# Altium PCB trigger_box_new.PcbDoc
Units mil, origin at the board's own origin, x right, y up, seen from the top; angles counter-clockwise.
Board outline 2204.72 x 2204.72 mil, 2 copper layers (Top Layer, Bottom Layer); 63 components, 59 nets, 323 pads, 69 vias.
Unrouted connection lines stored in the file: 57.
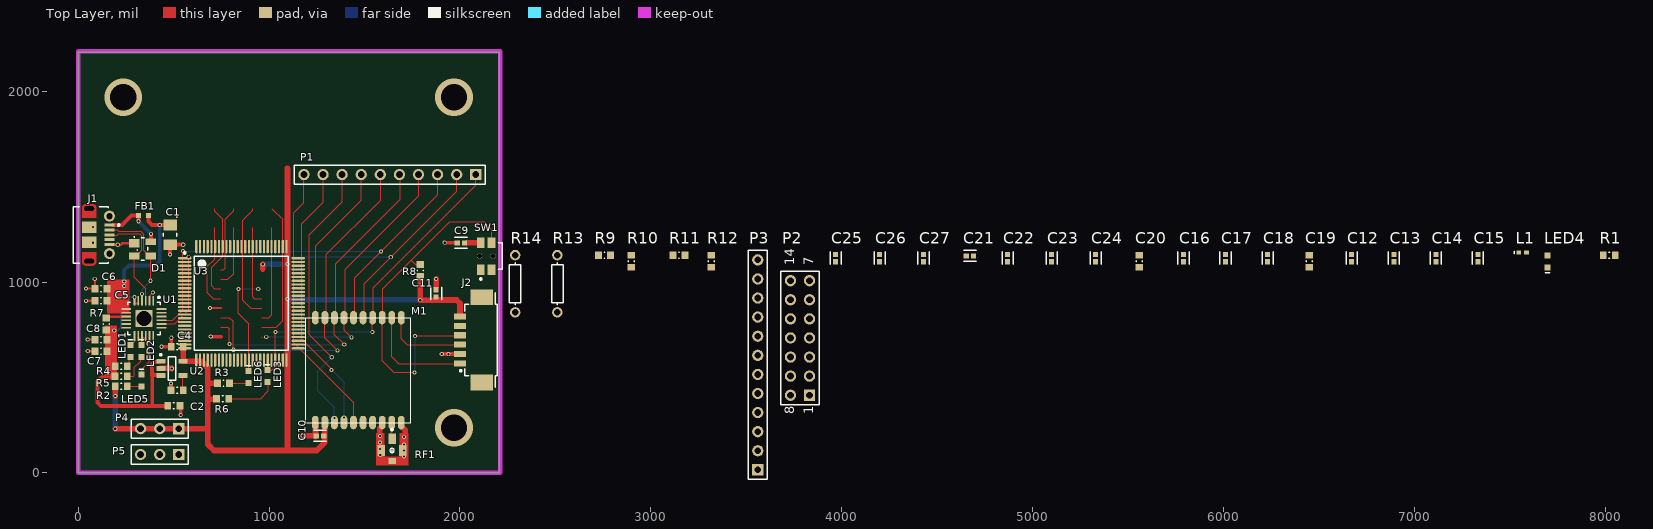
[diagram p0: Top Layer view]
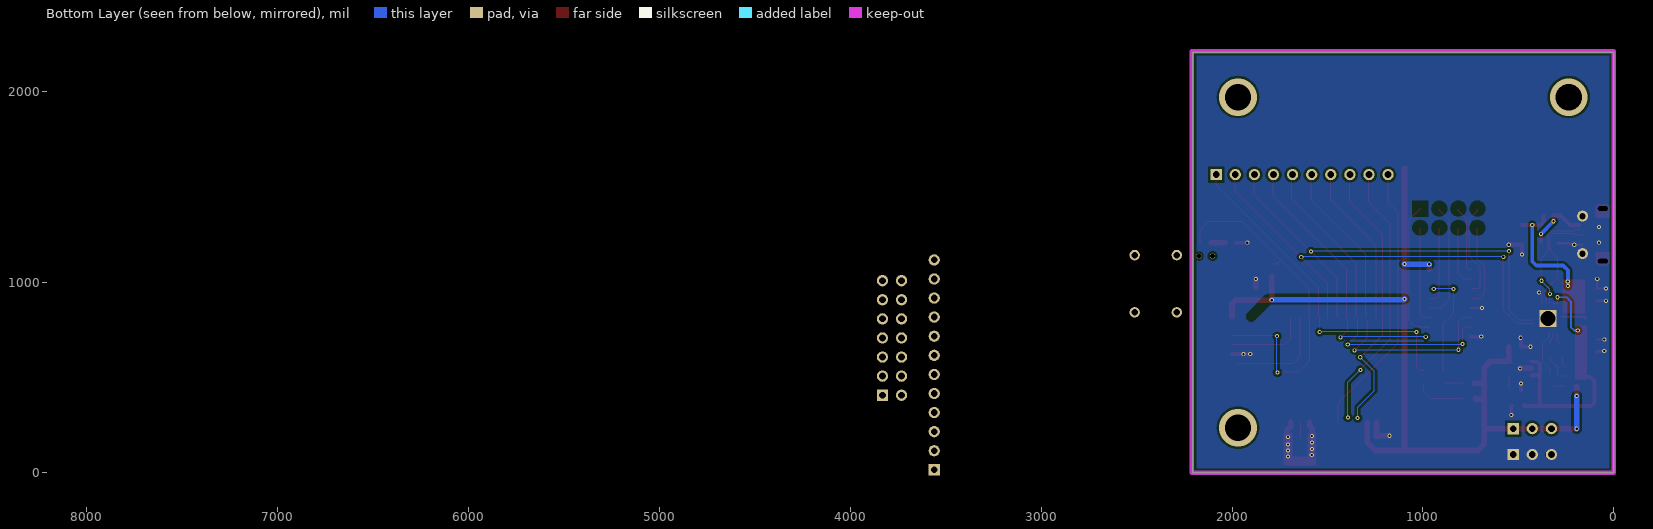
[diagram p1: Bottom Layer view, seen from below]

## Layer stack, top to bottom
Top Solder: solder mask 0.4, Solder Resist, Dk 3.5
Top Layer: signal copper 1.4
Dielectric 1: dielectric 12.6, FR-4, Dk 4.8
Bottom Layer: signal copper 1.4
Bottom Solder: solder mask 0.4, Solder Resist, Dk 3.5

## Board outline
0,0 0,2204.72 2204.72,2204.72 2204.72,0

## Design rules (kind name [scope] priority, off if disabled: settings)
Clearance Clearance_Ploy [InPoly] p1: gap=12 ignorepadtopadclearanceinfootprint=FALSE
Clearance [All] p2: gap=5 ignorepadtopadclearanceinfootprint=FALSE
ComponentClearance [All] p1: gap=4 collisioncheckmode=3 verticalgap=4 showdistances=FALSE
HoleSize [All] p1: absolutevalues=TRUE maxlimit=255.91 minlimit=11.81 maxpercent=80.000 minpercent=20.000
HoleToHoleClearance [All] p1: gap=4 allowstackedmicrovias=TRUE
MinimumSolderMaskSliver [All] p1: minsoldermaskwidth=0
PolygonConnect [All] p1: connectstyle=Direct reliefconductorwidth=10 reliefentries=4 polygonreliefangle="90 Angle" airgapwidth=10
RoomDefinition triggerbox [InComponentClass('triggerbox')] p1: confinementstyle=ConfineIn formatcopy=TRUE lockcomponents=FALSE outline 2249.95,-43 8085.95,-43 8085.95,1275 2249.95,1275
RoutingVias [All] p1: holewidth=12 width=20 viastyle="Through Hole" minholewidth=11.81 minwidth=19.68 maxholewidth=248.03 maxwidth=393.7
SilkToSilkClearance [All] p1: silktosilkclearance=0
SilkToSolderMaskClearance [IsPad] p1: minsilkscreentomaskgap=0 clearancetoexposedcopper=TRUE
SolderMaskExpansion [All] p1: expansion=1 istentingtop=FALSE
Width [All] p1: maxlimit=30 minlimit=5 preferedwidth=6 minimp=50.000000 maximp=50.000000 favimp=50.000000
24 further rules are at their usual default settings.

## Classes and differential pairs
component class triggerbox: C1 C2 C3 C4 C5 C6 C7 C8 C9 C10 C11 C12 C13 C14 C15 C16 C17 C18 C19 C20 C21 C22 C23 C24 C25 C26 C27 D1 FB1 J1 J2 L1 LED1 LED2 LED3 LED5 LED6 M1 P1 P5 R2 R3 R4 R5 R6 R7 R8 R9 R10 R11 R12 R13 R14 RF1 SW1 U1 U2 U3

## Components (designator, comment, footprint, x,y, rotation, side; value= is the part's Value field where it differs from the comment)
C1 "TAJA106K016RNJ" CAPMP3217X18-T_V 481.39,1247.36 r270 top
C2 "1uF" CAPC0603(1608)55_N 501.14,351.14 r180 top value=4.7uF
C3 "10nF" CAPC0603(1608)55_N 518.24,433.7 r0 top value=4.7uF
C4 "2.2uF" CAPC0603(1608)55_N 519.43,661.15 r0 top value=4.7uF
C5 "CAP 100nF 6.3V" CAPC0603(1608)100_N 119.8,901.71 r0 top value=100nF
C6 "CAP 4.7uF 6.3V" CAPC0603(1608)100_N 119.8,965.78 r0 top value=4.7uF
C7 "CAP 100nF 6.3V" CAPC0603(1608)100_N 119.45,637.33 r0 top value=100nF
C8 "CAP 4.7uF 6.3V" CAPC0603(1608)100_N 119.45,698.27 r0 top value=4.7uF
C9 "0.1uF" FP-GRM155-0_05-IPC_A 2004.68,1205.04 r180 top
C10 "0.1uF" FP-GRM155-0_05-IPC_A 1266.67,194.37 r180 top
C11 "0.01uF" FP-GRM155-0_05-IPC_A 1875.26,939.98 r90 top
C12 "10uF" FP-GRM155-0_05-IPC_A 6670.95,1125 r90 top
C13 "1uF" FP-GRM155-0_05-IPC_A 6891.95,1125 r90 top
C14 "0.1uF" FP-GRM155-0_05-IPC_A 7111.95,1125 r90 top
C15 "0.01uF" FP-GRM155-0_05-IPC_A 7331.95,1125 r90 top
C16 "0.1uF" FP-GRM155-0_05-IPC_A 5789.95,1125 r90 top
C17 "0.1uF" FP-GRM155-0_05-IPC_A 6009.95,1125 r90 top
C18 "0.01uF" FP-GRM155-0_05-IPC_A 6230.95,1125 r90 top
C19 "CAP 1uF 25V" CAPC0603(1608)100_N 6448.95,1109 r90 top value=1uF
C20 "CAP 100nF 6.3V" CAPC0603(1608)100_N 5557.95,1109 r90 top value=100nF
C21 "0.1uF" FP-GRM155-0_05-IPC_A 4670.95,1137 r0 top
C22 "0.1uF" FP-GRM155-0_05-IPC_A 4868.95,1125 r90 top
C23 "0.1uF" FP-GRM155-0_05-IPC_A 5098.95,1125 r90 top
C24 "0.01uF" FP-GRM155-0_05-IPC_A 5329.95,1125 r90 top
C25 "0.1uF" FP-GRM155-0_05-IPC_A 3967.95,1125 r90 top
C26 "0.1uF" FP-GRM155-0_05-IPC_A 4197.95,1125 r90 top
C27 "0.01uF" FP-GRM155-0_05-IPC_A 4427.95,1125 r90 top
D1 "SP0503BAHTG" LFUS-SOT143-4_V 337.6,1173.37 r0 top
FB1 "BLM18PG600SN1J" MURA-BLM18PG_KG-CHIP-2_V2 342.15,1348.46 r180 top
J1 "105017-0001" USB-MICRO-B_V 110.65,1246.97 r270 top
J2 "Header 6" GH-1.25-WS-6P 2110.81,696.29 r90 top
L1 "500mA" 0402-A 7566.95,1154 r0 top value=600ohm
LED1 "150060BS75000" 0603_A 274.53,638.06 r270 top
LED2 "150060BS75000" 0603_A 332.59,638.76 r270 top
LED3 "150060BS75000" 0603_A 992.62,506.97 r270 top
LED4 "150060BS75000" 0603_A 7696.95,1107 r90 top
LED5 "150060BS75000" 0603_A 332.59,485.19 r270 top
LED6 "150060BS75000" 0603_A 892.31,501.71 r270 top
M1 "CC1310-Module (Silicontrac)" CC1310ZTR4-GC 1742.52,264.53 r180 top
P1 "Header 10" HDR1X10 2082.58,1562.58 r180 top
P2 "Header 7X2A" HDR2X7_CEN 3830.95,407 r90 top
P3 "Header 12" HDR1X12 3559.95,16 r90 top
P4 "Header 3" HDR1X3 527,231.84 r180 top
P5 "Header 3" HDR1X3 526.82,96.29 r180 top
R1 "1K 1%" RESC0603(1608)_N 8019.95,1139 r0 top value="1000.00 Ohm"
R2 "1K 1%" RESC0603(1608)_N 225.55,454.62 r180 top value="1000.00 Ohm"
R3 "1K 1%" RESC0603(1608)_N 760.92,469.44 r180 top value="1000.00 Ohm"
R4 "1K 1%" RESC0603(1608)_N 225.35,559.47 r180 top value="1000.00 Ohm"
R5 "1K 1%" RESC0603(1608)_N 225,505.54 r180 top value="1000.00 Ohm"
R6 "1K 1%" RESC0603(1608)_N 756.68,389.47 r180 top value="1000.00 Ohm"
R7 "1K 1%" RESC0603(1608)_N 147.93,779.47 r90 top value="1000.00 Ohm"
R8 "10K 1% 0603(1608)" RESC0603(1608)_N 1792.05,1060.59 r90 top value="10000.00 Ohm"
R9 "1" RESC0603(1608)_N 2756.95,1139 r0 top value="1000.00 Ohm"
R10 "1" RESC0603(1608)_N 2896.95,1109 r90 top value="1000.00 Ohm"
R11 "1" RESC0603(1608)_N 3146.95,1139 r0 top value="1000.00 Ohm"
R12 "1" RESC0603(1608)_N 3316.95,1109 r90 top value="1000.00 Ohm"
R13 "Res1" AXIAL-0.3 2509.95,991 r90 top value=0
R14 "Res1" AXIAL-0.3 2288.95,991 r90 top value="1K 5%"
RF1 "RECE-20369-001E-01" IPEX_MHF_I 1644.06,117.11 r180 top
SW1 "EVQ-P7D01K" FP-EVQ-P7D01K-MFG 2137.38,1135.66 r90 top
U1 "CP2102N-A01-GQFN24" SLAB-QFN-24-2550x2550TP_A_V 344.19,809.26 r270 top
U2 "LP2985-33DBVR" DBV0005A_M 490.94,547.49 r0 top
U3 "LCMXO2-256HC-4TG100I" TQFP100_N 855.23,888.52 r0 top

## Footprints (in the part's own frame and the unit in brackets; to place one, negate y for a bottom-side part, rotate by r counter-clockwise, add the part's x,y. Pads: shape width x height; smd on the part's side, far side on the other; paste and mask are expansions set on the pad)
0402-A [mm] "Chip Inductor, Body 1.0x0.5mm, IPC High Density"
  rect 0.6x0.5 smd: 1(-0.5,0) 2(0.5,0)
  silkscreen extent -1.1,-0.15 -1.1,0.15, body extent -0.55,-0.3 0.55,0.3, height 0.55
0603_A [mm] "Chip LED, 2-Leads, Body 1.6x0.8mm, IPC Medium Density"
  rect 0.8x0.8 smd: 1(-0.8,0) 2(0.8,0)
  silkscreen extent -1.5,-0.3 -1.5,0.3, body extent -0.8,-0.4 0.8,0.4, height 0.7
AXIAL-0.3 [mm] "Axial Device, Thru-Hole; 2 Leads; 0.3 in Pin Spacing"
  round 1.4 hole 0.85: 1(-3.81,0) 2(3.81,0)
  silkscreen extent -2.77,-0.76 2.77,0.76
CAPC0603(1608)55_N [mm] "Chip Capacitor, Body 1.6x0.8mm, Height 0.55mm, IPC Medium Density"
  rect 0.9x1 smd: 1(-0.8,0) 2(0.8,0)
  silkscreen extent -0.05,-0.4 0.05,0.4, body extent -0.87,-0.48 0.88,0.47, height 0.55
CAPC0603(1608)100_N [mm] "Chip Capacitor, Body 1.6x0.8mm, Height 1.0mm, IPC Medium Density"
  rect 0.9x1 smd: 1(-0.8,0) 2(0.8,0)
  silkscreen extent -0.05,-0.4 0.05,0.4, body extent -0.87,-0.48 0.88,0.47, height 1
CAPMP3217X18-T_V [mm] "Molded Capacitor, 2-Leads, Body 3.40x1.8mm"
  rect 1.4x1.8 smd: 1(-1.3,0) 2(1.3,0)
  silkscreen extent -2.45,-0.9 0.2,0.95, body extent -1.92,-0.9 1.92,0.9, height 1.8
CC1310ZTR4-GC [mm]
  oval 0.9x1.8 smd: 1(1.27,-13.945) 2(2.544,-13.945) 3(3.814,-13.945) 4(5.084,-13.945) 5(6.354,-13.945) 6(7.624,-13.945) 7(8.894,-13.945) 8(10.164,-13.945) 9(11.434,-13.945) 10(12.704,-13.945) 11(12.708,0.015) 12(11.438,0.015) 13(10.168,0.015) 14(8.898,0.015) 15(7.628,0.015) 16(6.358,0.015) 17(5.088,0.015) 18(3.818,0.015) 19(2.548,0.015) 20(1.28,0.015)
  silkscreen extent 0,-13.94 14,0.06
DBV0005A_M [mm] "SOT23, 5-Leads, Body 3.05x1.75mm, Pitch 0.95mm, IPC Low Density"
  rrect15% 1.2x0.65 smd: 1(-1.475,0.95) 2(-1.475,0) 3(-1.475,-0.95) 4(1.475,-0.95) 5(1.475,0.95)
  silkscreen extent -1.6,-1.55 0.5,1.95, body extent -1.42,-1.46 1.42,1.46, height 1.08
FP-EVQ-P7D01K-MFG [mm]
  rect 1.4x1.05 smd paste+0 mask+0: 1(-1.8,0.725) 1'(1.8,0.725) 2(-1.8,-0.725) 2'(1.8,-0.725)
  round 0.7 hole 0.7 unplated paste-1000 mask+0: ""(0,0.9) ""(0,-0.9)
  silkscreen extent -3.17,-2.1 1.75,0.85, body extent -2.6,-2.2 2.6,1.55, height 0.25
FP-GRM155-0_05-IPC_A [mil]
  rect 28.16x26.48 smd paste+0 mask+0: 1(-18.84,0) 2(18.84,0)
  silkscreen extent -33,-29 33,29, body extent -41,-21 41,21, height 10
GH-1.25-WS-6P [mm]
  rect 0.81x1.6 smd: 1(-3.125,2.8) 2(-1.875,2.8) 3(-0.625,2.8) 4(0.625,2.8) 5(1.875,2.8) 6(3.125,2.8)
  rect 2.1x3 smd: MP1(-5.675,-0.1) MP2(5.675,-0.1)
  silkscreen extent -6.27,-2.17 6.27,2.82, body extent -6.13,-2.1 6.13,3.3, height 3.4
HDR1X3 [mm] "Connector; Header; 3 Position"
  rect 1.5x1.5 hole 0.9: 1(0,0)
  round 1.5 hole 0.9: 2(2.54,0) 3(5.08,0)
  silkscreen extent -1.27,-1.27 6.35,1.27
HDR1X10 [mm] "Connector; Header; 10 Position"
  rect 1.5x1.5 hole 0.9: 1(0,0)
  round 1.5 hole 0.9: 2(2.54,0) 3(5.08,0) 4(7.62,0) 5(10.16,0) 6(12.7,0) 7(15.24,0) 8(17.78,0) 9(20.32,0) 10(22.86,0)
  silkscreen extent -1.27,-1.27 24.13,1.27
HDR1X12 [mm] "Connector; Header; 12 Position"
  rect 1.5x1.5 hole 0.9: 1(0,0)
  round 1.5 hole 0.9: 2(2.54,0) 3(5.08,0) 4(7.62,0) 5(10.16,0) 6(12.7,0) 7(15.24,0) 8(17.78,0) 9(20.32,0) 10(22.86,0) 11(25.4,0) 12(27.94,0)
  silkscreen extent -1.27,-1.27 29.21,1.27
HDR2X7_CEN [mm] "Connector; Header; 7x2 Position"
  rect 1.5x1.5 hole 0.9: 1(0,0)
  round 1.5 hole 0.9: 2(2.54,0) 3(5.08,0) 4(7.62,0) 5(10.16,0) 6(12.7,0) 7(15.24,0) 8(0,2.54) 9(2.54,2.54) 10(5.08,2.54) 11(7.62,2.54) 12(10.16,2.54) 13(12.7,2.54) 14(15.24,2.54)
  silkscreen extent -1.27,-1.27 16.51,3.81
IPEX_MHF_I [mm]
  rect 1x1.4 smd: 1(0,-1.575)
  rect 1x1.5 smd: 2(1.448,0) 3(-1.448,0)
  rect 1x0.8 smd: 4(0,1.422)
  silkscreen extent -0.3,-2.92 0.3,0.3, body extent -0.85,-0.85 0.85,0.85, height 0.85
LFUS-SOT143-4_V [mm] "SOT143, 4-Leads, Body 3.04x1.4mm, Pitch 1.90mm"
  rect 1.4x1.1 smd: 1(-1.1,0.75)
  rect 1.4x0.9 smd: 2(-1.1,-0.95) 3(1.1,-0.95) 4(1.1,0.95)
  silkscreen extent -1.15,-1.5 0.7,1.65, body extent -0.7,-1.52 0.7,1.52, height 1.22
MURA-BLM18PG_KG-CHIP-2_V2 [mm] "Chip Ferrite Bead, 2-Leads, Body 1.6x0.8mm, Height 0.95mm, Reflow, 0.5 to 1.5A Rated Current"
  rect 0.65x0.7 smd: 1(-0.675,0) 2(0.675,0)
  body extent -0.8,-0.4 0.8,0.4, height 0.95
RESC0603(1608)_N [mm] "Chip Resistor, Body 1.6x0.8mm, IPC Medium Density"
  rect 0.9x1 smd: 1(-0.8,0) 2(0.8,0)
  silkscreen extent -0.05,-0.4 0.05,0.4, body extent -0.85,-0.47 0.85,0.47, height 0.6
SLAB-QFN-24-2550x2550TP_A_V [mm]
  rect 1.3x0.25 smd: 1(-2.35,1.25) 2(-2.35,0.75) 3(-2.35,0.25) 4(-2.35,-0.25) 5(-2.35,-0.75) 6(-2.35,-1.25) 13(2.35,-1.25) 14(2.35,-0.75) 15(2.35,-0.25) 16(2.35,0.25) 17(2.35,0.75) 18(2.35,1.25)
  rect 0.25x1.3 smd: 7(-1.25,-2.35) 8(-0.75,-2.35) 9(-0.25,-2.35) 10(0.25,-2.35) 11(0.75,-2.35) 12(1.25,-2.35) 19(1.25,2.35) 20(0.75,2.35) 21(0.25,2.35) 22(-0.25,2.35) 23(-0.75,2.35) 24(-1.25,2.35)
  rect 2.3x2.3 hole 2: 25(0,0)
  silkscreen extent -2.92,-2.15 2.15,2.15, body extent -2,-2 2,2, height 0.8
TQFP100_N [mm] "Thin QFP, 100-Leads, Body 14x14mm, Pitch 0.5mm, IPC Medium Density"
  oval 1.8x0.3 smd: 1(-7.55,6) 2(-7.55,5.5) 3(-7.55,5) 4(-7.55,4.5) 5(-7.55,4) 6(-7.55,3.5) 7(-7.55,3) 8(-7.55,2.5) 9(-7.55,2) 10(-7.55,1.5) 11(-7.55,1) 12(-7.55,0.5) 13(-7.55,0) 14(-7.55,-0.5) 15(-7.55,-1) 16(-7.55,-1.5) 17(-7.55,-2) 18(-7.55,-2.5) 19(-7.55,-3) 20(-7.55,-3.5) 21(-7.55,-4) 22(-7.55,-4.5) 23(-7.55,-5) 24(-7.55,-5.5) 25(-7.55,-6) 51(7.55,-6) 52(7.55,-5.5) 53(7.55,-5) 54(7.55,-4.5) 55(7.55,-4) 56(7.55,-3.5) 57(7.55,-3) 58(7.55,-2.5) 59(7.55,-2) 60(7.55,-1.5) 61(7.55,-1) 62(7.55,-0.5) 63(7.55,0) 64(7.55,0.5) 65(7.55,1) 66(7.55,1.5) 67(7.55,2) 68(7.55,2.5) 69(7.55,3) 70(7.55,3.5) 71(7.55,4) 72(7.55,4.5) 73(7.55,5) 74(7.55,5.5) 75(7.55,6)
  oval 0.3x1.8 smd: 26(-6,-7.55) 27(-5.5,-7.55) 28(-5,-7.55) 29(-4.5,-7.55) 30(-4,-7.55) 31(-3.5,-7.55) 32(-3,-7.55) 33(-2.5,-7.55) 34(-2,-7.55) 35(-1.5,-7.55) 36(-1,-7.55) 37(-0.5,-7.55) 38(0,-7.55) 39(0.5,-7.55) 40(1,-7.55) 41(1.5,-7.55) 42(2,-7.55) 43(2.5,-7.55) 44(3,-7.55) 45(3.5,-7.55) 46(4,-7.55) 47(4.5,-7.55) 48(5,-7.55) 49(5.5,-7.55) 50(6,-7.55) 76(6,7.55) 77(5.5,7.55) 78(5,7.55) 79(4.5,7.55) 80(4,7.55) 81(3.5,7.55) 82(3,7.55) 83(2.5,7.55) 84(2,7.55) 85(1.5,7.55) 86(1,7.55) 87(0.5,7.55) 88(0,7.55) 89(-0.5,7.55) 90(-1,7.55) 91(-1.5,7.55) 92(-2,7.55) 93(-2.5,7.55) 94(-3,7.55) 95(-3.5,7.55) 96(-4,7.55) 97(-4.5,7.55) 98(-5,7.55) 99(-5.5,7.55) 100(-6,7.55)
  silkscreen extent -7.67,-6.25 6.25,6.82, body extent -7,-7 7,7, height 1.6
USB-MICRO-B_V [mm] "USB, MICRO B, Body 7.491x4.695 mm, Pitch 0.65 mm"
  rect 0.4x1.35 smd: 1(-1.3,1.35) 2(-0.65,1.35) 3(0,1.35) 4(0.65,1.35) 5(1.3,1.35)
  round 1.45 hole 0.85: 6(-2.5,1.35) 7(2.5,1.35)
  rrect50% 0x0 hole 0.6 slot 1.3 at 90 deg: 8(-3.5,-1.35) 11(3.5,-1.35)
  rect 1.5x1.9 smd: 9(-1,-1.35) 10(1,-1.35)
  Top Layer circle w0.5: c-3.6,-0.9 r0.25
  Top Layer circle w0.5: c-3.6,-1.8 r0.25
  Top Layer region: -2.3,-2.3 -2.3,-0.4 -3.6,-0.4 -3.6,-2.3
  Top Layer region: 2.3,-0.4 2.3,-2.3 3.6,-2.3 3.6,-0.4
  Top Layer region: 3.6,-0.9 3.6,-1.8 4.1,-1.8 4.1,-0.9
  Top Layer region: -3.6,-1.8 -3.6,-0.9 -4.1,-0.9 -4.1,-1.8
  Top Layer lines w0.5: 3.805,-1.657 cw(c3.6,-1.8) 3.395,-1.657 cw(c3.6,-1.8) 3.6,-1.55 cw(c3.6,-1.8) 3.805,-1.657 ; 3.508,-1.132 cw(c3.6,-0.9) 3.368,-0.992 cw(c3.6,-0.9) 3.367,-0.991 cw(c3.6,-0.9) 3.6,-0.65 cw(c3.6,-0.9) 3.508,-1.132
  silkscreen extent -3.75,-3.5 3.75,2.7, body extent -4.1,-3.9 4.1,1.5, height 2.67

## Part data
C1: library part CMP-1661-00004-1, "Standard Tantalum, 10 uF, +/- 10%, 16 V, -55 to 125 degC, 2-Pin SMD (1206), RoHS, Tape and Reel", Case\Package=SOT-26, Frequency="300 MHz", Max Operating Temperature="150 degC", Max Power Dissipation="300 mW", Min Operating Temperature="-55 degC", Package Quantity=3000, ComponentLink1Description="Manufacturer URL", ComponentLink1URL=http://www.avx.com/, ComponentLink2Description=Datasheet, ComponentLink2URL=http://datasheets.avx.com/TAJ.pdf, ComponentLink3Description="Package Specification", ComponentLink3URL=http://www.avx.com/download/software/literature/AVX-Footprint-Library.pdf, DatasheetVersion=Feb-16, Elements=2, Height="1.3 mm", hFE Min=60, Length="3.1 mm", Mount="Surface Mount", PackageDescription="2-Pin Surface Mount Device, Body 3.2 x 1.65 mm", PackageReference=CAPMP3217X18-T, Packaging="Tape and Reel", Pins=6, Radiation Hardening=No, REACH SVHC="No SVHC", RoHSCompliant=true, Vce Max="500 mV", Width="1.7 mm"
C2 C3 C4: library part CMP-1035-02786-1, "CAP 4.7uF 10V ±20% 0603 (1608 Metric) Thickness 0.55mm SMD", Case-EIA=0603, Case-Metric=1608, Rated Voltage="10 V", Tolerance=Â±20%, Max Thickness="0.55 mm", Technology=SMT
C5 C7: library part CMP-1035-02575-1, "CAP 100nF 6.3V ±5% 0603 (1608 Metric) Thickness 1mm SMD", Case-EIA=0603, Case-Metric=1608, Rated Voltage="6.3 V", Tolerance=Â±5%, Max Thickness="1 mm", Technology=SMT
C6 C8: library part CMP-1035-02782-1, "CAP 4.7uF 6.3V ±20% 0603 (1608 Metric) Thickness 1mm SMD", Case-EIA=0603, Case-Metric=1608, Rated Voltage="6.3 V", Tolerance=Â±20%, Max Thickness="1 mm", Technology=SMT
C9 C10 C12 C13 C14 C15 C16 C17 C21 C22 C23 C25 C26: library part CMP-2008-04561-5, "CAP CER 0.1UF 10V X5R 0402", Capacitance=220nF, Case Code (Imperial)=0402, Case Code (Metric)=1005, Dielectric=X5R, Dielectric Material=Ceramic, Insulation Resistance=10GR, Max Operating Temperature=85°C, Min Operating Temperature=-55°C, Package Quantity=1, Tolerance=10%, Voltage=10V, Case/Package=0402, Depth=0.5mm, Height=0.5mm, Lead Free="Lead Free", Length=1mm, Material=Ceramic, Mount="Surface Mount", Number of Pins=2, Packaging="Tape and Reel", Radiation Hardening=No, REACH SVHC="No SVHC", RoHS Compliant=Yes, Series=GRM, Termination=SMD/SMT, Thickness=0.022inch, Voltage Rating=10V, Voltage Rating (DC)=10V, Width=0.5mm
C11 C18 C24 C27: library part CMP-2008-04561-5, "CAP CER 0.01UF 10V X5R 0402", Capacitance=220nF, Case Code (Imperial)=0402, Case Code (Metric)=1005, Dielectric=X5R, Dielectric Material=Ceramic, Insulation Resistance=10GR, Max Operating Temperature=85°C, Min Operating Temperature=-55°C, Package Quantity=1, Tolerance=10%, Voltage=10V, Case/Package=0402, Depth=0.5mm, Height=0.5mm, Lead Free="Lead Free", Length=1mm, Material=Ceramic, Mount="Surface Mount", Number of Pins=2, Packaging="Tape and Reel", Radiation Hardening=No, REACH SVHC="No SVHC", RoHS Compliant=Yes, Series=GRM, Termination=SMD/SMT, Thickness=0.022inch, Voltage Rating=10V, Voltage Rating (DC)=10V, Width=0.5mm
C19: library part CMP-1035-02741-1, "CAP 1uF 25V ±20% 0603 (1608 Metric) Thickness 1mm SMD", Case-EIA=0603, Case-Metric=1608, Rated Voltage="25 V", Tolerance=Â±20%, Max Thickness="1 mm", Technology=SMT
C20: library part CMP-1035-02576-1, "CAP 100nF 6.3V ±10% 0603 (1608 Metric) Thickness 1mm SMD", Case-EIA=0603, Case-Metric=1608, Rated Voltage="6.3 V", Tolerance=Â±10%, Max Thickness="1 mm", Technology=SMT
D1: library part CMP-2000-05191-1, "TVS Diode Array, 30 pF, 30 KV, -40 to 85 degC, 4-Pin SOT143, RoHS, Tape and Reel", Capacitance Value=30pF, Clamping Voltage=8V, Leakage Current=0.1uA, Manufacturer=Littelfuse, Operating Temp Range=-40Cto85C, Operating Temperature Classification=Industrial, Operating Temperature Max Deg. C=85C, Operating Temperature Min Deg. C=-40C, Package / Case=SOT-143, Reverse Stand-off Voltage=5.5(Min)V, Working Voltage=5.5V, Working Voltage (Max)=5.5V(Min), Clamping Voltage (Max)=8V, Configuration=Triple, Datasheet URL=https://datasheet.ciiva.com/15143/getdatasheetpartid-116020-15143550.pdf, Datasheet Version=Dec-13, Direction Type=Uni-Directional, Leakage Current (Max)=0.1uA, Manufacturer URL=http://www.littelfuse.com/, Mounting=SurfaceMount, Mounting Style=SurfaceMount, Number of Elements=3, Package Type=SOT-143, Packaging=TapeandReel, Pin Count=3+Tab, Polarity=Uni-Directional, Product Depth (mm)=1.4mm, Product Height (mm)=1.05mm, Product Length (mm)=3.04mm, Rad Hardened=No, Suppressor Type=TVS
FB1: library part CMP-0686-00574-2, "Chip Ferrite Bead for Power Lines, 60 Ohm, 500 mA, -55 to 125 degC, 1.6 x 0.8 x 0.95 mm SMD, Tape and Reel", DC Resistance="0.10 Ohm Max.", Manufacturer=Murata, Operating Temperature Range="-55 to 125 degC", Rated Current="500 mA", ComponentLink1Description="Manufacturer URL", ComponentLink1URL=http://www.murata.com/, ComponentLink2Description=Datasheet, ComponentLink2URL=http://www.murata.com/products/catalog/pdf/c31e.pdf, ComponentLink3Description="Package Specification", ComponentLink3URL=http://www.murata.com/products/catalog/pdf/c31e.pdf, DatasheetVersion=08/2013, Impedance (at 100 MHz)="60 Ohm Typ.", Mounting Technology="Surface Mount", PackageDescription="2-Pin Chip, Body 1.6 x 0.8 mm", PackageReference=BLM18_H950-2, Packing="Tape and Reel", PartNumber=BLM18PG600SN1J
J1: library part CMP-2000-05827-1, "Micro-USB B Receptacle, Right Angle, Bottom Mount, Surface Mount, with Solder Tabs, -30 to 85 degC, 5-Pin USB, RoHS, Tape and Reel", Manufacturer=Molex, Package Description="5-Leads USB, Micro B, Body 7.5 x 5 mm, Pitch 0.65 mm", Package Reference=MICRO-B, Package Version="Rev. F, 12/2012", Standard Package=1, Voltage - Max=30V, 3D Model=105017-0001.stp, Catalog Drawings=1050170001, Category=Connectors,Interconnects, Circuits=5, Connector Type=USB-microB, Datasheet URL=http://www.molex.com/elqNow/elqRedir.htm?ref=http://www.molex.com/webdocs/datasheets/pdf/en-us/1050170001_IO_CONNECTORS.pdf, Datasheet Version=03/2016, Family=USB,DVI,HDMIConnectors, Featured Product=Micro-USBConnectorsUSBConnectors, Features=Shielded,SolderRetention, Gender=Receptacle, Ingress Protection=-, Manufacturer URL=http://www.molex.com/, Mating Products=WM17145-ND-CABLEMICROUSBBTOSTDA1.0MWM17147-ND-CABLEMICROUSBBTOSTDA2.0MWM17146-ND-CABLEMICROUSBBTOSTDA1.5M, Mounting Technology=SurfaceMount, Mounting Type=BoardCutout,SurfaceMount,RightAngle, Number Of Contacts=5, Online Catalog=Molex-MicroUSB, Other Names=WM1399DKR, Package URL=http://www.molex.com/pdm_docs/sd/1050170001_sd.pdf, Packaging=Digi-Reel®, PCN Assembly/Origin=ResinSupplier21/Oct/2015, RoHS Information=1050170001CertofCompliance, Series=-, Specifications=-
J2: "Header, 6-Pin", LatestRevisionDate=17-Jul-2002, LatestRevisionNote="Re-released for DXP Platform.", Publisher="Altium Limited"
L1: library part Inductor, "Inductor", Code_IEC=1005, Code_JEITA=0402, LatestRevisionDate=29-May-2009, LatestRevisionNote="IPC-7351 Footprint Added.", PackageDescription="Chip Inductor", PackageReference=0402-A, Published=8-Jun-2000, Publisher="Altium Limited"
LED1 LED2 LED3 LED4 LED5 LED6: library part CMP-1426-00003-1, "SMD mono-color Chip LED, WL-SMCW, Blue", Color=Blue, Manufacturer="Wuerth Elektronik", ComponentLink1Description="Manufacturer URL", ComponentLink1URL=http://www.we-online.com, ComponentLink2Description=Datasheet, ComponentLink2URL=http://katalog.we-online.com/led/datasheet/150060BS75000.pdf, PackageReference=0603_A, PartNumber=150060BS75000
M1: library part CC1310-MOD
P1: "Header, 10-Pin", LatestRevisionDate=17-Jul-2002, LatestRevisionNote="Re-released for DXP Platform.", Publisher="Altium Limited"
P2: "Header, 7-Pin, Dual row", LatestRevisionDate=17-Jul-2002, LatestRevisionNote="Re-released for DXP Platform.", Publisher="Altium Limited"
P3: "Header, 12-Pin", LatestRevisionDate=17-Jul-2002, LatestRevisionNote="Re-released for DXP Platform.", Publisher="Altium Limited"
P4 P5: "Header, 3-Pin", LatestRevisionDate=17-Jul-2002, LatestRevisionNote="Re-released for DXP Platform.", Publisher="Altium Limited"
R1 R2 R3 R4 R5 R6 R9 R10 R11 R12: library part CMP-1012-00510-1, "1K 0.1W 1% 0603 (1608 Metric)  SMD", Case-EIA=0603, Case-Metric=1608, Power="0.1 W", Tolerance="1 %", Technology=SMT
R7: library part CMP-1012-00510-1, "1K 0.1W 1% 0603 (1608 Metric)  SMD", Case-EIA=0603, Case-Metric=1608, Manufacturer="Vishay Dale", Manufacturer Part Number=CRCW06031K00FKEB, Power="0.1 W", Tolerance="1 %", Technology=SMT
R8: library part CMP-1012-00623-1, "10K 0.1W 1% 0603 (1608 Metric)  SMD", Case-EIA=0603, Case-Metric=1608, Power="0.1 W", Tolerance="1 %", Technology=SMT
R13 R14: "Resistor", LatestRevisionDate=17-Jul-2002, LatestRevisionNote="Re-released for DXP Platform.", PackageDescription="Axial Device, Thru-Hole; 2 Leads; 0.3 in Pin Spacing", PackageReference=AXIAL-0.3, Published=8-Jun-2000, Publisher="Altium Limited"
RF1: library part TG-RECE-20369-001E-01-4, "RF Connector, Onboard Receptacle, IPEX MHFIII", Housing Color=Gold, Manufacturer=Taoglas, ComponentLink1Description="Manufacturer URL", ComponentLink1URL=http://www.taoglas.com/, ComponentLink2Description=Datasheet, ComponentLink2URL=http://www.taoglas.com/images/product_images/original_images/RECE.20369.001E.01.pdf, ComponentLink3Description="Package Specification", ComponentLink3URL=http://www.taoglas.com/images/product_images/original_images/RECE.20369.001E.01.pdf, DatasheetVersion="Rev. C", Mounting Technology="Surface Mount", PackageDescription="4-Pin, Hand Drawn, Body 1.7x1.7mm", PackageReference=RECE-20369-001E-01-4, PackageVersion="Rev. C", Packing="Tape and Reel", PartNumber=RECE-20369-001E-01
SW1: library part CMP-05618-000102-1, "SWITCH TACTILE SPST-NO 0.05A 12V", Actuator Color=Black, Contact Current Rating=50mA, Contact Resistance=500mR, Max Operating Temperature=70°C, Max Voltage Rating (DC)=12V, Min Operating Temperature=-20°C, Operating Force=2.2N, Package Quantity=1, Actuator Length=0.65mm, Current Rating=50mA, Depth=3.55mm, Electrical Life=100000Cycles, Illumination Type=Non-Illuminated, Lead Free="Lead Free", Length=4.3mm, Max Current Rating=50mA, Mechanical Life=100000Cycles, Mount="Surface Mount", Orientation="Right Angle", Packaging="Tape and Reel", Radiation Hardening=No, REACH SVHC="No SVHC", Series=EVQP7, Size=2.9mm, Switch Function=Off-Mom, Switch Travel=0.2mm, Termination=J-Bend, Throw Configuration=SPST, Voltage Rating (DC)=12V
U1: library part SLAB-CP2102N-QFN-24, "USBXpress(TM) Family, 4 GPIOs, 2.2 to 3.6 V, -40 to 85 degC, 24-Pin QFN, RoHS", Case\/Package=QFN, Manufacturer="Silicon Labs", Max Operating Temperature=85degC, Max Supply Voltage=3.6V, Min Operating Temperature=-40degC, Min Supply Voltage=3V, Package Description="24-Pin Quad Flat No-lead Package, Body 4 x 4 mm, Pitch 0.5 mm", Package Reference=QFN-24-2550x2550TP_A, Datasheet URL=http://www.silabs.com/documents/public/data-sheets/cp2102n-datasheet.pdf, Datasheet Version="Rev. 1.1, 08/2016", Manufacturer URL=http://www.silabs.com/, Mounting Technology=SurfaceMount, Number of Pins=24, REACH SVHC=Unknown, RoHSCompliant=False
U2: library part CMP-0758-00080-2, "Single Output Low Noise LDO, 150 mA, Fixed 3.3 V Output, 1.5% Tolerance, 2.2 to 16 V Input, Low IQ, 5-Pin SOT-23 (DBV), -40 to 125 degC, Green (RoHS & no Sb/Br), Tape and Reel", Manufacturer="Texas Instruments", Operating Temperature Range (degC)="-40 to 125", Accuracy (%)=1.5, ComponentLink1Description="Manufacturer URL", ComponentLink1URL=http://www.ti.com/, ComponentLink2Description=Datasheet, ComponentLink2URL=http://www.ti.com/lit/ds/symlink/lp2985-50.pdf, ComponentLink3Description="Package Specification", ComponentLink3URL=http://www.ti.com/litv/pdf/mpds018j, DatasheetVersion=SLVS522N, Fixed Output Options (V)=3.3, Iout (Max) (A)=0.15, Iq (Typ) (mA)=0.85, Mounting Technology="Surface Mount", Output Options="Fixed Output", PackageDescription="5-Pin Plastic Small Outline, Body 2.9 x 1.6 mm, Pitch 0.95 mm", PackageReference=DBV0005A, PackageVersion=4073253-4/L, Packing="Tape and Reel", PartNumber=LP2985-33DBVR, RoHS=TRUE, Vdo (Typ) (mV)=280, Vin (V)="2.2 to 16"
U3: library part CMP-0111-00366-1, "MachXO2 High Performance CPLD with 256 LUTs, Voltage Regulator, 2.5V/3.3V, 100-pin TQFP, Speed Grade-4, Industrial Grade, Halogen Free (RoHS)", Code_JEDEC=MS-026-BED, DatasheetVersion="ver01.0, Nov-2010", PackageDescription="100-Pin Thin Quad Flat Pack (TQFP100)", PackageReference=TQFP100, PackageVersion="ver02.6, Nov-2010"

## Via types
v1: diameter 21.65, hole 11.81, Top Layer to Bottom Layer, tented both sides, 61 vias
v2: diameter 21.65, hole 11.81, Top Layer to Bottom Layer, 5 vias
v3: diameter 196.85, hole 137.8, Top Layer to Bottom Layer, tented both sides, 3 vias

## Nets (pads, with @x,y where several pads share a name; then routed paths per layer and width w, separated by ;. In a path a pad name is that pad's centre, name@x,y a point inside that pad or via, vN(x,y) a via of type N, cw(c..) or ccw(c..) an arc to the next point about the centre after c; other vN are vias at no path point)
3.3V: C12.1 C13.1 C14.1 C15.1 L1.2 P2.1 R1.2 R9.2 R10.2 R11.2 R12.2 U3.50 U3.100
3.3VD: C4.2 C20.2 J2.6 L1.1 M1.12 P4.1 P4.2 P4.3 R2.2 R3.2 R6.2 R8.1 U2.5 | length 4923.9
  Top Layer w15: 962.55,1063.52 966.86,1067.84
  Top Layer w30: R2.2 194.73,453.94 v1(194.73,403.29) ; v1(194.65,231.62) 326.78,231.62 P4.3 P4.2 P4.1 677.36,231.84 678.79,230.41 ; C4.2 549.97,660.19 549.97,585.85 U2.5 644.48,584.9 678.79,550.58 678.79,467.84 ; R6.2 725.19,388.82 722.47,386.1 678.79,386.1 ; R3.2 680.39,469.44 678.79,467.84 ; 966.86,1067.84 v1(966.86,1092.57) ; 1094.65,1596.01 1096.38,1594.28 v1(1096.38,1094.14) 1096.88,1093.64 v1(1096.88,910.88) 1096.84,910.84 1096.84,119.1 ; M1.12 1291.16,262.88 1291.16,158.78 1249.29,116.92 711.71,116.92 678.79,149.84 678.79,230.41 ; R8.1 v1(1792.05,904.77) 1871.54,904.77 1875.26,908.49 1877.71,906.04 1982.44,906.04 2000.01,888.47 2000.01,820.27 2000.57,819.7 J2.6 ; 678.79,230.41 678.79,386.1 ; 678.79,386.1 678.79,467.84
  Bottom Layer w30: v1(194.65,231.62) 194.73,231.7 v1(194.73,403.29) ; v1(966.86,1092.57) 1094.82,1092.57 v1(1096.38,1094.14) ; v1(1096.88,910.88) 1101.2,906.57 v1@1790.25,906.57
74HC148_Status_LED: LED6.1 | length 556.5
  Top Layer w6: v1(839.28,963.78) 839.28,835.47 892.48,782.26 892.48,533.38 LED6.1
  Bottom Layer w6: v1(839.28,963.78) v2(943.05,963.78)
CC1310_nRESET: C19.1 J2.4 M1.3 R8.2 SW1.2' | length 1866.6
  Top Layer w6: v1(1762.19,525.94) 1653.33,525.94 1592.37,586.9 M1.3 1596.18,817.33 1596.18,964.5 1744.64,1112.96 ; v1(1764.56,716.28) 1767.86,719.58 1999.26,719.58 J2.4 ; R8.2 1765.51,1092.09 1744.64,1112.96 ; SW1.2'@2165.93,1199.63 SW1.2' 2166.9,1207.5 2166.9,1273.61 2125.93,1314.58 1946.26,1314.58 1744.64,1112.96
  Bottom Layer w6: v1(1762.19,525.94) 1764.56,528.32 v1(1764.56,716.28)
CC1310_TCKC: J2.1 M1.2 | length 549.6
  Top Layer w6: M1.2 1642.37,608.98 1678.58,572.77 J2.1@1972.44,572.77
CC1310_TMSC: J2.3 M1.1 | length 432.3
  Top Layer w6: M1.1 1692.52,701.74 1722.58,671.69 J2.3
CC1310_UART_RX: M1.5 P1.2 U1.20 | length 2478.7
  Top Layer w6: U1.20@421.46,780.16 504.79,780.16 578.61,853.97 v2(578.61,1131.68) ; M1.5@1499.41,809.54 1499.41,991.01 1983.93,1475.53 P1.2@1983.93,1562.58
  Bottom Layer w6: v2(578.61,1131.68) 1636.12,1131.68 v1(1637.52,1130.28)
CC1310_UART_TX: M1.6 P1.3 U1.21 | length 2428.4
  Top Layer w6: U1.21@421.46,799.84 496.16,799.84 548.75,852.43 v2(548.75,1161.45) ; M1.6@1449.41,809.54 1449.41,1023.1 1883.27,1456.96 P1.3@1883.27,1562.58
  Bottom Layer w6: v2(548.75,1161.45) 1584.38,1161.45 v1(1585.72,1160.11)
CoP_LED1: LED3.1 M1.4 P1.1 | length 1786.7
  Top Layer w6: LED3.1@992.62,537.95 LED3.1 1015.07,538.46 1032.94,556.33 v1(1032.94,738.38) ; v1(1540.74,738.38) 1541.55,739.2 1541.55,812.71 1546.69,817.84 1546.69,970.75 2082.58,1506.65 P1.1
  Bottom Layer w6: v1(1032.94,738.38) v1(1540.74,738.38)
CP2102_3.3VDD: C2.2 C7.2 C8.2 R4.2 R5.2 R7.1 U1.5 U1.6 U2.1 U2.3 | length 1184.5
  Top Layer w10: U1.6@295.34,920.33 v1(295.47,920.2) 295.47,886.46 U1.5@315.16,886.46
  Top Layer w20: 154.69,503.44 123.22,503.44 100.93,481.15 100.93,368.71 118.5,351.14 387.5,351.14 ; 387.16,512.89 387.16,522.62 396.89,512.89 430.07,512.89 U2.3 ; U2.1 430.07,582.1 399.22,582.1 387.16,570.05 387.16,537.15 387.5,536.81 387.5,512.89 387.5,351.14 ; C2.2@454.19,351.14 387.5,351.14 ; C2.2@466.92,355.83 469.64,353.11 C2.2
  Bottom Layer w10: v1(188.91,746.27) 189.17,746.01 207.76,746.01 225.07,763.32 225.07,897.72 247.55,920.2 v1(295.47,920.2)
CP2102_RXT: LED1.1 U1.13 | length 72
  Top Layer w6: LED1.1 295.47,690.49 U1.13@295.47,732.91
CP2102_SUSPEND: LED5.1 U1.15 | length 247.7
  Top Layer w6: LED5.1 332.59,542.85 358.84,569.09 371.72,581.97 371.72,679.84 343.81,707.76 337.25,714.31 337.25,730.5 U1.15@334.84,732.91
CP2102_TXT: LED2.1 U1.14 | length 69.6
  Top Layer w6: U1.14@314.66,732.42 317.06,730.02 317.06,711.52 332.59,695.99 LED2.1
D+: D1.2 J1.3 U1.3 | length 574
  Top Layer w6: J1.3@163.4,1243.8 203.97,1243.8 212.39,1252.23 322.04,1252.23 331.76,1242.51 331.76,1165.28 318.85,1152.37 318.85,1149.52 293.99,1124.65 292.95,1124.65 292.95,1024.86 354.43,963.38 U1.3@354.43,886.55
D-: D1.3 J1.2 U1.4 | length 577.2
  Top Layer w6: J1.2@175.07,1272.49 205,1272.49 212.77,1264.72 327.78,1264.72 343.28,1249.22 343.28,1166.28 356.35,1153.21 356.35,1144.64 376.34,1124.65 379.57,1124.65 379.57,1006.92 v1(379.22,1006.58) ; v1@334.26,937.54 334.26,887.03 U1.4@334.84,886.46
  Bottom Layer w6: v1@334.26,936.86 334.59,937.18 v1(334.59,937.83) 334.59,961.94 v1(379.22,1006.58)
DIO_6: M1.10 P1.7 | length 849.1
  Top Layer w6: M1.10 1244.19,815.34 1244.19,1188.84 1483.93,1428.59 P1.7@1483.93,1562.58
DIO_7: M1.13 P1.8 | length 1462.6
  Top Layer w6: v1@1328.33,606.77 1210.29,724.81 1210.29,1248.06 1382.58,1420.35 P1.8 ; M1.13@1349.23,259.93 M1.13@1349.23,260.38
  Bottom Layer w6: v1(1328.37,606.12) 1254.45,532.19 1254.45,430.71 1342.28,342.88 v2(1342.28,287.02)
DIO_8: M1.14 P1.9 | length 1409.2
  Top Layer w6: P1.9 1282.58,1416.46 1170.92,1304.8 1170.92,699 v1@1328.17,541.75
  Bottom Layer w6: v1(1327.52,539.61) 1392.83,474.3 v2(1392.83,289.72)
DIO_9: M1.15 P1.10 | length 1456.7
  Top Layer w6: P1.10 1182.58,1416.32 1128.27,1362.01 1128.27,682.46 1442.29,368.44 M1.15@1442.29,258.44
FPGA_INITn: LED4.1 P2.14 U3.77 | length 732.9
  Top Layer w6: 962.51,763.52 1037.16,763.52 1070.97,797.33 1070.97,1327.51 1014.18,1384.29
GND: C1.2 C2.1 C3.1 C4.1 C5.1 C6.1 C7.1 C8.1 C9.1 C9.2 C10.1 C10.2 C11.1 C11.2 C12.2 C13.2 C14.2 C15.2 C16.1 C16.2 C17.1 C17.2 C18.1 C18.2 C19.2 C20.1 C21.1 C21.2 C22.1 C22.2 C23.1 C23.2 C24.1 C24.2 C25.1 C25.2 C26.1 C26.2 C27.1 C27.2 D1.1 J1.5 J1.6 J1.7 J1.8 J1.9 J1.10 J1.11 J2.2 M1.11 M1.18 M1.20 P5.1 P5.2 P5.3 R9.1 R10.1 R11.1 RF1.2 RF1.3 RF1.4 SW1.1' U1.2 U1.25 U2.2 U3.5 U3.6 U3.11 U3.22 U3.23 U3.26 U3.33 U3.44 U3.46 U3.55 U3.56 U3.72 U3.73 U3.79 U3.80 U3.92 U3.93 | length 2812
  Top Layer w6: U1.2@374.21,886.46 374.21,927.73 v1(391.09,944.61) ; 714.18,1384.29 714.18,1371.68 756.22,1329.64 756.22,1134.27 698.46,1076.51 698.46,980.4 713.92,964.94 746.53,964.94 747.95,963.52 ; 747.95,1063.52 761.12,1063.52 769.94,1072.34 769.94,1329.4 814.18,1373.65 814.18,1384.29 ; 962.51,813.52 998.2,813.52 1014.18,829.51 1014.18,1284.29
  Top Layer w12: v1(40.8,901.25) 88.2,901.25 C5.1@88.3,901.35 ; v1(40.8,965.68) 88.2,965.68 C6.1 87.68,966.41 87.68,1015.96 v1(87.05,1016.58) ; v1(49.61,698.72) 84.43,698.72 C8.1@84.84,699.13 ; v1(49.88,638) 85.54,638 87.11,636.43 C7.1@87.21,636.53 ; C5.1 C5.1@88.62,901.4 ; C7.1@89.01,630.82 C7.1@89.11,630.92 ; C7.1@89.11,631.28 C7.1@89.42,630.96 ; J1.5 224.06,1195.78 231.17,1202.89 D1.1 D1.1@292.23,1200.84 ; v1(690.44,864.11) 690.74,863.82 747.65,863.82 747.95,863.52
  Top Layer w19.68: v1(435.99,660.83) 436.15,660.99 487.77,660.99 C4.1 v1(487.93,708.16) ; v1(480.53,1144.15) 481.39,1145 C1.2 548.71,1196.18 549.56,1195.33 v1(550.09,1195.33) ; v1(486.65,468.38) 486.65,433.8 C3.1 ; C2.1 536.75,347.02 v1(536.75,303.53) ; v1@1913.07,622.43 1912.89,622.61 v1(1904.67,622.61) 2000.44,622.61 J2.2 ; v1(1919.71,1205.97) 1920.26,1205.41 C9.2@1978.68,1205.41
  Top Layer w30: U2.2 489.9,547.49 v1@490.65,546.75 ; v1(1175.02,194.39) C10.2@1235.18,194.37 ; M1.11 1241.85,263.57 1242.84,262.59 C10.2@1242.84,189.87 ; v1@1578.94,201.4 1578.94,231.48 1592.2,244.73 M1.18 ; M1.20 1692.13,244.73 1712.56,224.3 1712.56,211.85 ; v1@1702.32,192.85 v1@1703.7,191.47 ; RF1.3@1706.23,142.31 v1@1706.23,188.94 ; v1(1874.95,1016.09) 1874.95,971.8 C11.2@1875.26,971.48 ; C9.1@2036.18,1205.04 2036.92,1205.78 2108.1,1205.78 SW1.1'
  Bottom Layer w19.68: P5.3 P5.3@331.04,96.29
  Bottom Layer w30: P5.3@331.04,96.29 P5.3@331.58,95.75
  other v1: 1706.66,85.5 1582.19,93.38 1706.66,117.11 1580.86,124.73 1706.66,149.13 1580.59,159.54 1706.66,188.94 1581.77,193.39 490.65,547.13 1939.98,622.17 207.41,1195.18 77.57,1206.12 77.3,1287.47
NetC3_2: C3.2 U2.4 | length 75.9
  Top Layer w6: C3.2@549.01,434.21 U2.4
NetLED1_2: LED1.2 R4.1 | length 54.4
  Top Layer w6: R4.1 268.34,570.97 268.34,600.37 LED1.2
NetLED2_2: LED2.2 R5.1 | length 149
  Top Layer w6: R5.1 291.31,505.54 294.82,509.06 294.82,552.82 328.04,586.03 328.04,594.52 LED2.2@335.08,601.56
NetLED3_2: LED3.2 R6.1 | length 262.9
  Top Layer w6: R6.1@789.08,389.49 955.04,389.49 994.97,429.42 LED3.2@994.97,469.86
NetLED4_2: LED4.2 R1.1
NetLED5_2: LED5.2 R2.1 | length 62.5
  Top Layer w6: R2.1 318.22,454.62 LED5.2@319.15,453.7
NetLED6_2: LED6.2 R3.1 | length 102.6
  Top Layer w6: R3.1@789.66,470.51 LED6.2@892.31,470.51
NetM1_19: M1.19 RF1.1 | length 81.1
  Top Layer w6: RF1.1@1640.75,183.4 1640.75,262.47 M1.19
NetP2_2: P2.2 U3.95 | length 440.5
  Top Layer w6: 714.18,1284.29 714.61,1283.86 714.61,1119.79 676.53,1081.71 676.53,943.7 706.7,913.52 747.95,913.52
NetP2_3: P2.3 U3.94
NetP2_4: P2.4 U3.91
NetP2_5: P2.5 U3.90 | length 318.9
  Top Layer w6: 747.95,1013.52 783.33,1013.52 814.18,1044.37 814.18,1284.29
NetP2_6: P2.6 U3.82
NetP2_7: P2.7 U3.81
NetP2_8: P2.8 U3.32
NetP2_9: P2.9 U3.31
NetP2_10: P2.10 U3.27
NetP2_11: P2.11 U3.49
NetP2_12: P2.12 U3.48
NetP2_13: P2.13 U3.76
NetP3_1: P3.1 U3.75
NetP3_2: P3.2 U3.74
NetP3_3: P3.3 U3.71
NetP3_4: P3.4 U3.70
NetP3_5: P3.5 U3.67
NetP3_6: P3.6 U3.66
NetP3_7: P3.7 U3.58
NetP3_8: P3.8 U3.57
NetP3_9: P3.9 U3.54
NetP3_10: P3.10 U3.53
NetP3_11: P3.11 U3.52
NetP3_12: P3.12 R13.1
NetR7_2: R7.2 U1.9 | length 122.9
  Top Layer w15: R7.2 154.79,817.82 266.14,817.82 U1.9@267.42,819.1
NetR13_2: R13.2 R14.2 U3.51
VBUS: C1.1 C5.2 C6.2 FB1.1 U1.7 U1.8 | length 630.5
  Top Layer w20: FB1.1 368.72,1317.08 387.27,1298.54 v1(427.04,1298.54) C1.1
  Bottom Layer w20: v1@240.63,979.51 240.63,1061.5 265.32,1086.19 406.24,1086.19 427.04,1106.99 v1(427.04,1298.54)
  other v1: 240.84,979.51 241.33,1002.91
VBUS_IN: D1.4 FB1.2 J1.1 | length 320.3
  Top Layer w20: J1.1@181.23,1298.43 229.08,1298.43 279.11,1348.46 FB1.2 315.31,1348.2 v1(315.31,1318.33) ; D1.4 381.07,1210.93 381.07,1252.04 v1(381.23,1252.2)
  Bottom Layer w20: v1(315.31,1318.33) 315.31,1318.12 v1(381.23,1252.2)
VCCIO3: R12.1
Visual_label_PWM: M1.7 P1.4 R14.1 | length 1467.7
  Top Layer w6: M1.7@1390.45,801.04 1393.98,797.51 1393.98,747.13 v1(1431.18,709.93) ; M1.7@1399.41,809.54 1399.41,1066.25 1784.52,1451.36 P1.4@1784.52,1562.58
  Bottom Layer w6: v1(985.22,712.83) 1428.28,712.83 v1(1431.18,709.93)
pads on no net: J1.4 J2.5 J2.MP1 J2.MP2 M1.8 M1.9 M1.16 M1.17 P1.5 P1.6 SW1. SW1.1 SW1.2 U1.1 U1.10 U1.11 U1.12 U1.16 U1.17 U1.18 U1.19 U1.22 U1.23 U1.24 U3.1 U3.2 U3.3 U3.4 U3.7 U3.8 U3.9 U3.10 U3.12 U3.13 U3.14 U3.15 U3.16 U3.17 U3.18 U3.19 U3.20 U3.21 U3.24 U3.25 U3.28 U3.29 U3.30 U3.34 U3.35 U3.36 U3.37 U3.38 U3.39 U3.40 U3.41 U3.42 U3.43 U3.45 U3.47 U3.59 U3.60 U3.61 U3.62 U3.63 U3.64 U3.65 U3.68 U3.69 U3.78 U3.83 U3.84 U3.85 U3.86 U3.87 U3.88 U3.89 U3.96 U3.97 U3.98 U3.99
copper on no net: | length 4682.4
  Top Layer w6: 747.95,763.52 783.22,763.52 792.42,754.32 v1(792.42,675.29) ; 747.95,813.52 791.37,813.52 811.53,793.37 811.53,646.8 v1(813.4,644.92) ; 914.18,1284.29 914.18,922.06 922.72,913.52 962.51,913.52 ; 914.18,1384.29 914.18,1374.6 862.98,1323.39 862.98,903.74 903.19,863.52 962.51,863.52 ; 962.51,713.52 966.19,709.85 ; 1294.56,797.06 1292.37,794.87 1292.37,707.88 v1(1358.19,642.07) ; 1298,810.94 1298,848.07 1299.41,849.48 1299.41,1145 1583.93,1429.52 1583.93,1562.58 ; 1342.96,804.41 1342.37,803.82 1342.37,723.7 v1(1393.43,672.64) ; 1348.62,816.69 1349.41,817.47 1349.41,1096.59 1686.72,1433.91 1686.72,1562.58
  Top Layer w19.68: v1(694.17,714.6) 695.25,713.52 747.94,713.52
  Bottom Layer w6: v1(792.42,675.29) 795.42,672.29 802.96,672.29 803.77,671.49 v1@1394.97,671.49 ; v1(813.4,644.92) 816.26,642.07 v1(1358.19,642.07)
  other v3: 1968.5,236.22 236.22,1968.5 1968.5,1968.5

## Polygon pours and split planes (outlines as drawn)
no net on Top Layer "NONET_L01_P007" (solid, pour order 7): 9.23,985.99
no net on Top Layer "NONET_L01_P005" (solid, pour order 5): 20.37,989.31
no net on Top Layer "NONET_L01_P002" (solid, pour order 2): 102.14,1268.93
no net on Top Layer "NONET_L01_P001" (solid, pour order 1): 94.51,1288.76
GND on Bottom Layer "Top Layer-GND" (solid, pour order 40): 0,0 0,2204.72 2204.72,2204.72 2204.72,0

## Keep-outs
Keep-Out Layer:
  lines w23.62: 0,0 0,2210 2210,2210 2210,0 0,0

## Other copper
Top Layer:
  rectangle net VBUS: 151.37,835.8 269.14,1013.7
  rectangle net GND: 1559.77,39.09 1729.67,85.89
  rectangle net GND: 1682.81,75.61 1729.66,209.02
  rectangle net GND: 1559.77,76.91 1604.06,209.5
  rectangle net CP2102_3.3VDD: 139.69,488.44 202.51,770.98

## Silkscreen, mask and mechanical layers (free items; w line width, h text height)
Mechanical 1:
  the board outline again, w10

## Text inside footprints (layer, text, board x,y; h text height)
P2: Top Overlay "14" at 3750.95,1087 h50 r90; Top Overlay "7" at 3850.95,1087 h50 r90; Top Overlay "1" at 3850.95,307 h50 r90; Top Overlay "8" at 3750.95,307 h50 r90